# EAGLE board ACME_V4 (EAGLE 9.2.2)
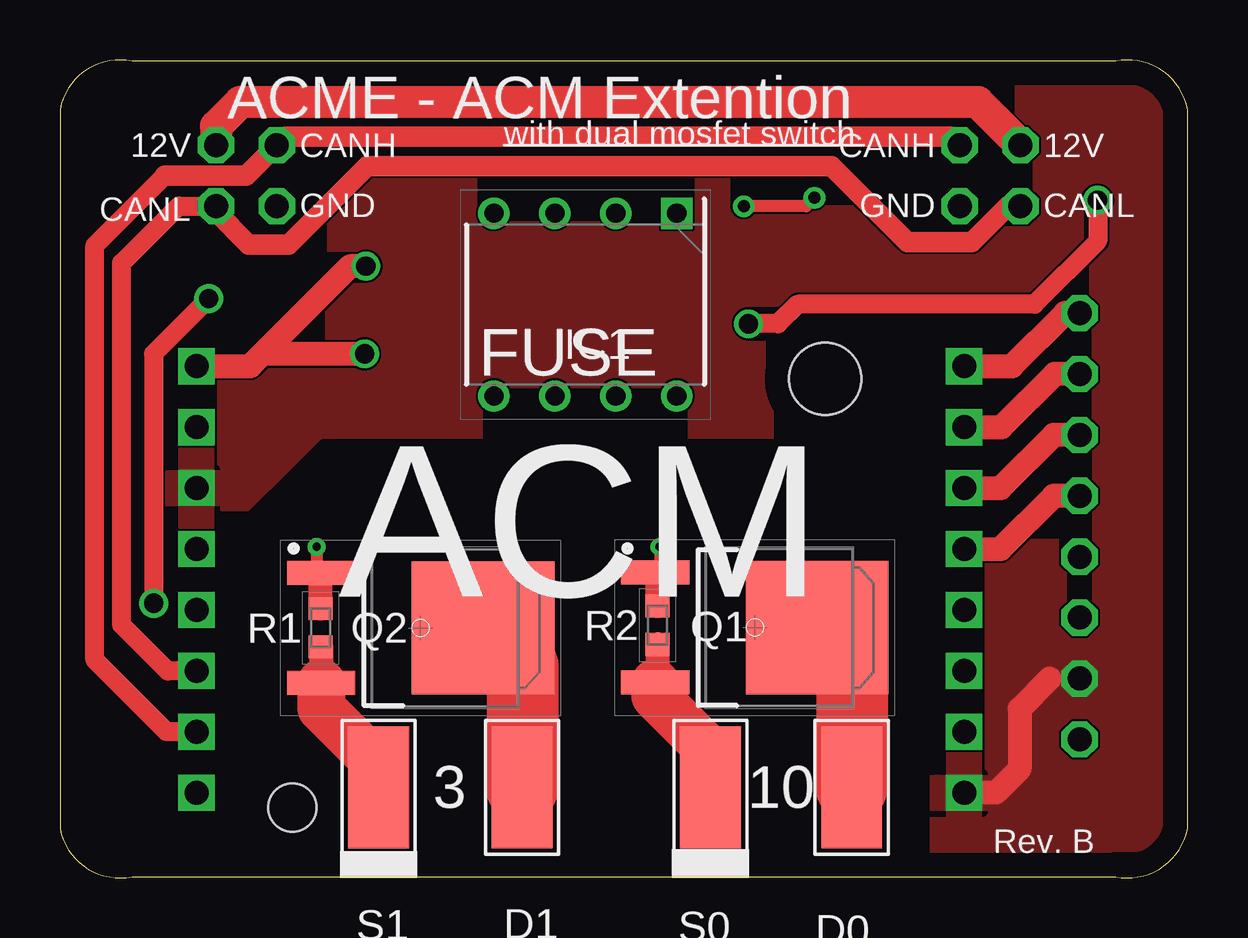
[diagram p0: board, top side]
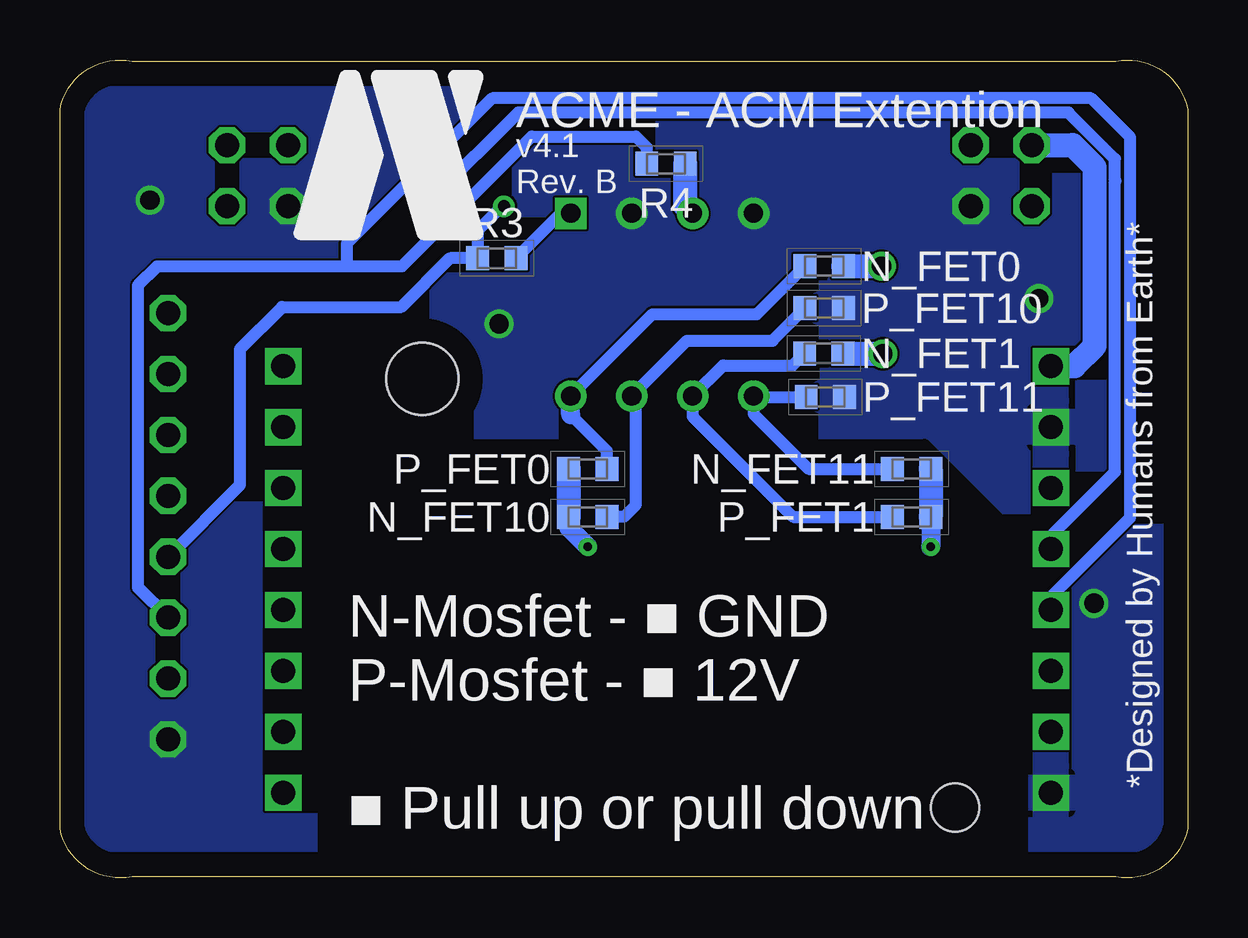
[diagram p1: board, bottom side, seen from below]

Size 47 x 34.1 mm. Coordinates in mm from the lower left corner, seen from the top.
Outline: 3,0.05 44,0.05 arc90 47,2.05 47,32.05 arc90 44,34.05 3,34.05 arc90 0,32.05 0,2.05 arc90 3,0.05
Copper layers (1*16): Top 0.035mm / dielectric 1.53mm / Bottom 0.035mm
Design rules "default *": minimum track width 3.5mil, minimum drill 0.2mm, track to track 3.5mil, track to pad 3.5mil, pad to pad 10mil, via to via 10mil, smd to smd 3.5mil, copper to edge 40mil, drill to drill 6mil, minimum pad ring 10mil, minimum via ring 8mil, stop-mask expansion 4mil, vias tented up to drill 0mil, thermal gap 10mil
Holes 2 mm at 9.69,2.94
Holes 3 mm at 31.9,20.8

## Footprints (pad centres in the part's own frame; a part is rotated, then mirrored left to right if it is on the bottom)
5-2,5 = smd 2.54 x 5.08: 1 0,0
DIP762W60P254L966H485Q8N = drill 0.8 pad 1.2 square: 1 -3.81,3.81 | drill 0.8 pad 1.2: 2 -3.81,1.27; 3 -3.81,-1.27; 4 -3.81,-3.81; 5 3.81,-3.81; 6 3.81,-1.27; 7 3.81,1.27; 8 3.81,3.81
RESC1608X55N = smd 0.95 x 1: 1 -0.8,0; 2 0.8,0
TO229P990X238-4N = smd 2.85 x 1: 1 -4.15,2.29; 3 -4.15,-2.29 | smd 5.95 x 5.55: 4 2.6,0
ACM_CAS_FP = drill 1 square: 5V1_P 32,3.61; 5V_P 0,16.31; 12V_P 0,21.39; CANH_P 0,6.15; CANL_P 0,8.69; GND0_P 0,18.85; GND1_P 0,3.61; I/O_AD0_P 32,21.39; I/O_AD1_P 32,18.85; I/O_AD2_SDA_P 32,16.31; I/O_AD3_SCL_P 32,13.77; MISO_P 32,11.23; MOSI_P 32,8.69; PWM0_P 0,13.77; PWM1_INT1_P 0,11.23; SCK_P 32,6.15
16P_CONNECTOR_FP = drill 1 octagon: 1 0,0; 2 2.54,0; 3 0,-2.54; 4 2.54,-2.54
16P_CONNECTOR_FP' = drill 1 octagon: 1 0,0; 2 2.54,0; 3 5.08,0; 4 7.62,0; 5 10.16,0; 6 12.7,0; 7 15.24,0; 8 17.78,0

## Placement (x,y rotation side)
D0  [5-2,5]  33,3.78 180 top
D1  [5-2,5]  19.26,3.78 180 top
IC1  Optocoupler DIP  [DIP762W60P254L966H485Q8N]  21.9,23.9 270 top
N_FET0  [RESC1608X55N]  15.15,25.5 0 bottom
N_FET1  [RESC1608X55N]  15.16,21.87 0 bottom
N_FET10  [RESC1608X55N]  25,15.05 180 bottom
N_FET11  [RESC1608X55N]  11.5,17.05 0 bottom
P_FET0  [RESC1608X55N]  25,17.05 180 bottom
P_FET1  [RESC1608X55N]  11.5,15.05 0 bottom
P_FET10  [RESC1608X55N]  15.15,23.75 0 bottom
P_FET11  [RESC1608X55N]  15.1,20.05 0 bottom
Q1  NGD8201ANT4G  [TO229P990X238-4N]  28.96,10.44 0 top
Q2  NGD8201ANT4G  [TO229P990X238-4N]  15.04,10.43 0 top
R1  [RESC1608X55N]  10.86,10.43 270 top
R2  [RESC1608X55N]  24.91,10.54 270 top
R3  200 Ohm  [RESC1608X55N]  28.79,25.83 180 bottom
R4  200 Ohm  [RESC1608X55N]  21.74,29.77 180 bottom
S0  [5-2,5]  27.12,3.78 0 top
S1  [5-2,5]  13.28,3.78 180 top
U$1  ACM_CASTELLATED  [ACM_CAS_FP]  5.69,-0.06 0 top
U$3  16P_CONNECTOR  [16P_CONNECTOR_FP]  6.5,30.55 0 top
U$4  16P_CONNECTOR  [16P_CONNECTOR_FP]  37.5,30.55 0 top
U$5  16P_CONNECTOR  [16P_CONNECTOR_FP']  42.5,23.55 270 top

## Library data of the parts
D0 D1 S0 S1 = wirepad
IC1 = TLP350(F); DESCRIPTION: Toshiba TLP350(F) DC Input Optocoupler, Through Hole, 8-Pin PDIP; HEIGHT: 4.85mm; MANUFACTURER_NAME: Toshiba; MANUFACTURER_PART_NUMBER: TLP350(F); MOUSER_PART_NUMBER: 757-TLP350(F); MOUSER_PRICE-STOCK: https://www.mouser.com/Search/Refine.aspx?Keyword=757-TLP350%28F%29; RS_PART_NUMBER: 0186022P; RS_PRICE-STOCK: http://uk.rs-online.com/web/p/products/0186022P
N_FET0 N_FET1 N_FET10 N_FET11 P_FET0 P_FET1 P_FET10 P_FET11 R1-R4 = ERA-3AEB2262V(0603 Resistor); DESCRIPTION: Thin Film Resistors - SMD 0603 22.6Kohm 0.1% 25ppm; HEIGHT: 0.55mm; MANUFACTURER_NAME: Panasonic; MANUFACTURER_PART_NUMBER: ERA-3AEB2262V; MOUSER_PART_NUMBER: 667-ERA-3AEB2262V; MOUSER_PRICE-STOCK: https://www.mouser.com/Search/Refine.aspx?Keyword=667-ERA-3AEB2262V
Q1 Q2 = NGD8201ANT4G_Mosfet; ALLIED_NUMBER: 70341208; ALLIED_PRICE-STOCK: http://www.alliedelec.com/on-semiconductor-ngd8201ant4g/70341208/; HEIGHT: 2.38mm; MANUFACTURER_NAME: ON Semiconductor; MANUFACTURER_PART_NUMBER: NGD8201ANT4G; MOUSER_PART_NUMBER: 7470901; MOUSER_PRICE-STOCK: http://uk.rs-online.com/web/p/products/7470901; RS_PART_NUMBER: 7470901; RS_PRICE-STOCK: http://uk.rs-online.com/web/p/products/7470901
U$1 = ACM_Pindown
U$3 U$4 = 4P_Connector holes
U$5 = 8P_Connector holes_Screwterminal

## Nets
5V: U$1.5V1_P U$1.5V_P U$5.7
12V: N_FET0.2 N_FET1.2 U$1.12V_P U$3.1 U$4.2
AD0: U$1.I/O_AD0_P U$5.1
AD1: U$1.I/O_AD1_P U$5.2
AD2: U$1.I/O_AD2_SDA_P U$5.3
AD3: U$1.I/O_AD3_SCL_P U$5.4
CANH: U$1.CANH_P U$3.2 U$4.1
CANL: U$1.CANL_P U$3.3 U$4.4
DRAIN0: D0.1 Q1.4
DRAIN1: D1.1 Q2.4
GATE0: N_FET10.2 P_FET0.2 Q1.1 R2.1
GATE1: N_FET11.2 P_FET1.2 Q2.1 R1.1
GND: IC1.2 IC1.4 P_FET10.2 P_FET11.2 U$1.GND0_P U$1.GND1_P U$3.4 U$4.3 U$5.8
N$2: IC1.1 R3.1
N$4: IC1.8 N_FET0.1 P_FET0.1
N$5: IC1.6 N_FET1.1 P_FET1.1
N$6: IC1.3 R4.1
N$8: IC1.5 N_FET11.1 P_FET11.1
N$9: IC1.7 N_FET10.1 P_FET10.1
PWM0: R3.2 U$1.PWM0_P U$5.5
PWM1: R4.2 U$1.PWM1_INT1_P U$5.6
SOURCE0: Q1.3 R2.2 S0.1
SOURCE1: Q2.3 R1.2 S1.1

## Tracks (layer width: path | path; a pad name or v marks a point on that pad's centre or on a via)
5V
  Top 1: U$1.5V1_P 39,3.55 40,4.55 40,7.05 41.26,8.31
  pour Top: 60,42.05 60,2.05 50,-7.95 -5,-7.95 -9,-3.95 -9,32.05 1,42.05
  cutout Top: 37,-1.95 36,-0.95 36,18.05 11,18.05 6.85,13.9 6.85,-1.95
12V  (via drill 0.8)
  Top 1: U$1.12V_P 7.93,21.33 8.43,21.83 | 8.43,21.83 12.68,21.83 v12.7,21.85 | v12.75,25.5 12.1,25.5 8.43,21.83
  Top 1.33: U$3.1 6.5,31.34 7.51,32.35 38.27,32.35 40.04,30.57 U$4.2
  Bottom 1: U$1.12V_P 4.71,21.33 3.87,22.17 3.87,29.63 4.79,30.55 U$3.1 | N_FET1.2 12.72,21.87 v12.7,21.85 | N_FET0.2 v12.75,25.5
AD0
  Top 1: U$1.I/O_AD0_P 39.68,21.33 41.9,23.55 U$5.1
AD1
  Top 1: U$1.I/O_AD1_P 39.24,18.79 41.46,21.01 U$5.2
AD2
  Top 1: U$1.I/O_AD2_SDA_P 39.2,16.25 41.42,18.47 U$5.3
AD3
  Top 1: U$1.I/O_AD3_SCL_P 39.2,13.71 41.42,15.93 U$5.4
CANH
  Top 0.8: U$1.CANH_P 4.45,6.09 1.45,9.08 1.45,26.37 4.37,29.28
  Top 0.85: U$4.1 37.14,30.91 9.4,30.91 U$3.2 7.77,29.28 4.37,29.28
CANL
  Top 0.8: U$1.CANL_P 4.49,8.63 2.57,10.55 2.57,25.63 4.95,28.01 U$3.3
  Top 0.85: U$3.3 6.5,27.78 7.87,26.41 9.54,26.41 12.81,29.68 32.15,29.68 35.33,26.5 38,26.5 39.51,28.01 U$4.4
DRAIN0
  Top 3: D0.1 33.01,8.99 Q1.4
DRAIN1
  Top 3: D1.1 19.29,3.81 19.29,8.78 Q2.4
GATE0  (via drill 0.35)
  Top 0.5: v25,13.8 25,12.92 Q1.1
  Top 1: R2.1 24.91,12.63 Q1.1
  Bottom 0.8: v25,13.8 25.8,14.6 N_FET10.2
  Bottom 1: P_FET0.2 N_FET10.2
GATE1  (via drill 0.35)
  Top 0.5: v10.7,13.8 10.7,12.9 Q2.1
  Top 1: Q2.1 10.86,12.69 R1.1
  Bottom 0.8: P_FET1.2 v10.7,13.8
  Bottom 1: N_FET11.2 P_FET1.2
GND  (via drill 0.8)
  Top 0.8: v43.25,28.25 43.25,26.55 40.62,23.92 30.75,23.92 29.93,23.1 v28.7,23.1 | v6.2,24.15 3.9,21.85 v3.9,11.45
  pour Bottom: 54,40.05 54,-10.95 -12,-10.95 -12,40.05
  cutout Bottom: 36,-2.95 36,18.05 10.95,18.05 6.9,14 6.9,-2.95
N$2
  Bottom 0.5: R3.1 26.11,27.71 IC1.1
N$4
  Bottom 0.5: P_FET0.1 24.2,17.8 25.71,19.31 | N_FET0.1 17.95,23.5 22.3,23.5 IC1.8
  Bottom 0.8: 25.71,19.31 IC1.8
N$5
  Bottom 0.5: P_FET1.1 16.44,15.05 20.63,19.24 IC1.6 19.35,21.37 16.46,21.37 N_FET1.1
N$6
  Bottom 1: R4.1 20.94,28.02 IC1.3
N$8
  Bottom 0.5: N_FET11.1 15.8,17.05 18.09,19.34 IC1.5 18.05,20.05 P_FET11.1
N$9
  Bottom 0.5: N_FET10.1 23.5,15.05 23,15.55 23,19.92 | P_FET10.1 17.3,22.4 20.86,22.4 IC1.7
  Bottom 0.8: 23,19.92 IC1.7
PWM0  (via drill 0.5)
  Top 0.5: v31.45,28.35 31.1,28 v28.5,28
  Bottom 0.5: U$5.5 39.51,16.38 39.51,22.04 37.75,23.8 32.77,23.8 30.74,25.83 R3.2 29.59,26.98 28.57,28 v28.5,28 | U$1.PWM0_P 5.69,14.26 3.03,16.92 3.03,29.02 3,29.05 3.03,29.08 3.03,29.97 4.96,31.91 27.89,31.91 v31.45,28.35
PWM1
  Bottom 0.5: 35.04,25.49 32.76,25.49 27.34,30.91 23,30.91 22.54,30.45 R4.2 | 35.04,25.49 42.96,25.49 43.74,24.71 43.74,12.09 U$5.6 | U$1.PWM1_INT1_P 5.69,11.72 2.39,15.02 2.39,30.87 4.01,32.5 28.99,32.5 35.04,26.44 35.04,25.49
SOURCE0
  Top 1: R2.2 24.91,8.25 Q1.3
  Top 2: Q1.3 24.81,7.6 27.12,5.29 S0.1
SOURCE1
  Top 1: R1.2 10.89,9.6 Q2.3
  Top 2: Q2.3 10.89,7.09 13.28,4.7 S1.1

## Text on the board
bPlace: N-Mosfet - ■ GND / P-Mosfet - ■ 12V / / ■ Pull up or pull down
tNames: ACME - ACM Extention | 12V | with dual mosfet switch | CANH | CANH | 12V | CANL | GND | GND | CANL | 3 | 10 | Rev. B
bNames: ACME - ACM Extention | v4.1 | Rev. B | *Designed by Humans from Earth*